# Altium PCB PCB_RocketOnBoardComputer.pcbdoc
Units mil, origin at the board's own origin, x right, y up, seen from the top; angles counter-clockwise.
Board outline 4041.49 x 3254.09 mil, 2 copper layers (Top Layer, Bottom Layer); 92 components, 79 nets, 409 pads, 65 vias.
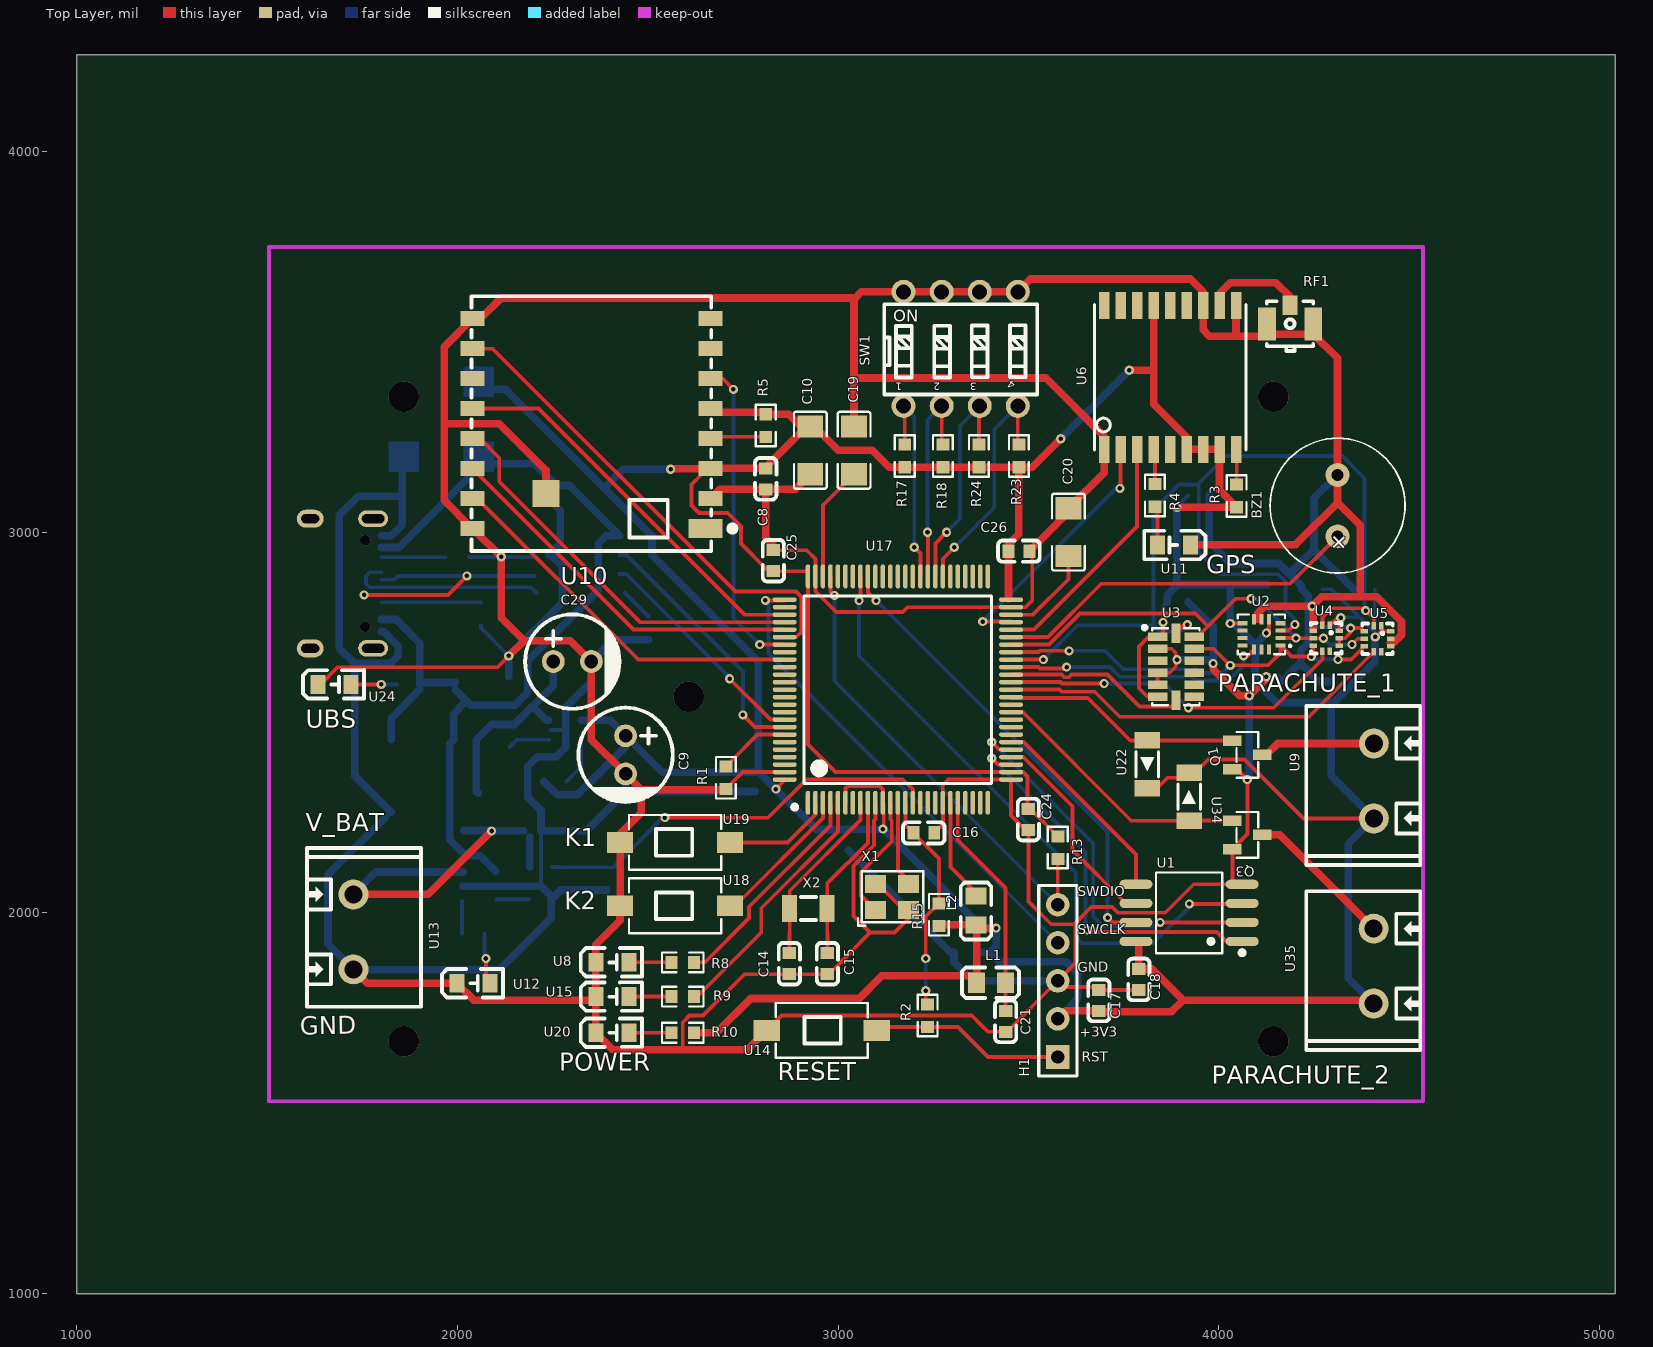
[diagram p0: Top Layer view]
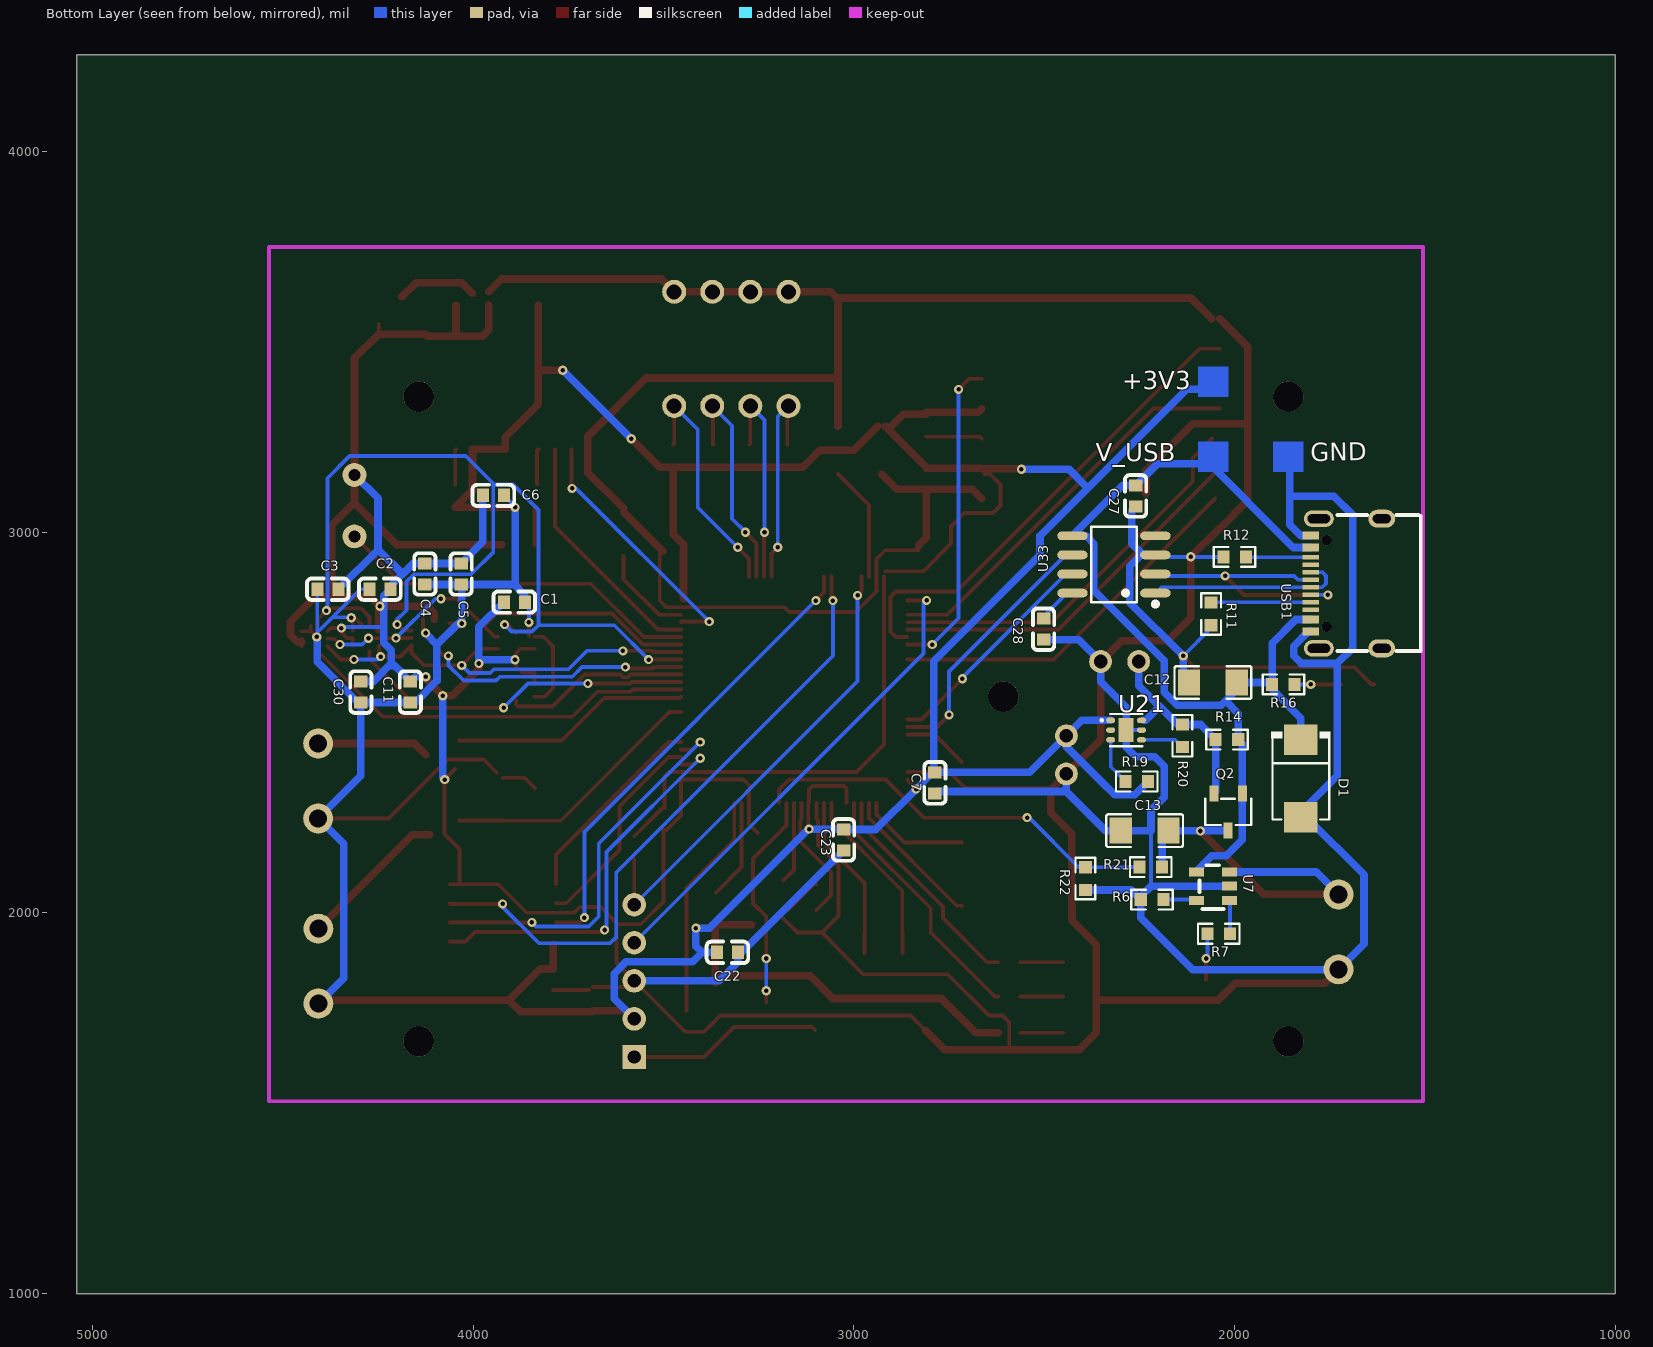
[diagram p1: Bottom Layer view, seen from below]

## Layer stack, top to bottom
Top Layer: signal copper (thickness not stored)
Dielectric: dielectric 12.6, FR-4, Dk 4.8
Bottom Layer: signal copper (thickness not stored)

## Board outline
5041.49,1000 1000,1000 1000,4254.09 5041.49,4254.09

## Components (designator, comment, footprint, x,y, rotation, side; value= is the part's Value field where it differs from the comment)
BZ1 "BUZZER_9X4MM" BUZZER_BEEPER:BUZZER_9X4MM 4311.89,2920 r90 top
C1 "100nF" C0603#1 3892.05,2816.38 r0 bottom
C2 "100nF" C0603#1 4245,2850 r180 bottom
C3 "100nF" C0603#1 4381.89,2850 r180 bottom
C4 "100nF" C0603#1 4126.89,2890 r90 bottom
C5 "100nF" C0603#1 4031.89,2890 r90 bottom
C6 "100nF" C0603#1 3947.05,3096.38 r0 bottom
C7 "100nF" C0603#1 2787.05,2341.38 r270 bottom
C8 "100nF" C0603#2 2810,3140 r90 top
C9 "100uF" CAP-D6.3×F2.5 2441.89,2415 r270 top
C10 "10uF" C1206#1 2926.89,3215 r270 top
C11 "100nF" C0603#1 4165,2580 r90 bottom
C12 "10uF" C1206#2 2056.89,2605 r180 bottom
C13 "10uF" C1206#2 2236.2,2215.92 r0 bottom
C14 "12pF" C0603#2 2872.05,1866.38 r270 top
C15 "12pF" C0603#2 2972.05,1866.38 r270 top
C16 "100nF" C0603#2 3225,2210 r180 top
C17 "100nF" C0603#2 3790,1825 r90 top
C18 "100nF" C0603#2 3685,1770 r90 top
C19 "2.2uF" C1206#1 3041.89,3215 r270 top
C20 "2.2uF" C1206#1 3605,3000 r270 top
C21 "100nF" C0603#2 3440,1715 r90 top
C22 "100nF" C0603#1 3332.05,1896.38 r180 bottom
C23 "100nF" C0603#1 3027.05,2191.38 r270 bottom
C24 "100nF" C0603#2 3500,2245 r90 top
C25 "100nF" C0603#2 2830,2925 r270 top
C26 "100nF" C0603#2 3475,2950 r180 top
C27 "100nF" C0603#1 2260,3095 r270 bottom
C28 "100nF" C0603#1 2501.89,2745 r270 bottom
C29 "100uF" CAP-D6.3×F2.5 2301.89,2660 r0 top
C30 "100nF" C0603#1 4295,2580 r90 bottom
D1 "SMBJ5.0A" SMB_L4.6-W3.5-LS5.3-RD 1825.94,2352.89 r90 bottom
H1 "HDR-F-2.54_1x5" HDR-F-2.54_1X5 3577.05,1821.38 r90 top
L1 "220Ω" L0805 3402.05,1816.38 r0 top
L2 "220Ω" L0805 3362.05,2006.38 r90 top
Q1 "AO3400B" SOT-23-3_L2.9-W1.3-P1.90-LS2.4-BR 4075,2415 r180 top
Q2 "AO3401A-3L" SOT-23-3_L2.9-W1.6-P1.90-LS2.8-BR 2016.89,2265 r270 bottom
Q3 "AO3400B" SOT-23-3_L2.9-W1.3-P1.90-LS2.4-BR 4075,2205 r180 top
R1 "10k" R0603#1 2705,2355 r90 top
R2 "10k" R0603#1 3235,1730 r90 top
R3 "10k" R0603#1 4046.89,3095 r90 top
R4 "1k" R0603#1 3832.05,3096.38 r270 top
R5 "10k" R0603#1 2810,3280 r270 top
R6 "10k" R0603#2 2216.89,2035 r180 bottom
R7 "470" R0603#2 2041.89,1945 r180 bottom
R8 "470" R0603#1 2591.89,1870 r180 top
R9 "470" R0603#1 2591.89,1780 r180 top
R10 "470" R0603#1 2591.89,1685 r180 top
R11 "5.1k" R0603#2 2061.89,2785 r90 bottom
R12 "5.1k" R0603#2 2000,2935 r0 bottom
R13 "1k" R0603#1 3577.05,2171.38 r90 top
R14 "100k" R0603#2 2020,2455 r0 bottom
R15 "10k" R0603#1 3265,1995 r90 top
R16 "470" R0603#2 1871.89,2600 r0 bottom
R17 "1k" R0603#1 3175,3200 r270 top
R18 "1k" R0603#1 3275,3200 r270 top
R19 "10k" R0603#2 2256.89,2345 r0 bottom
R20 "10k" R0603#2 2136.89,2465 r90 bottom
R21 "100k" R0603#2 2220,2120 r180 bottom
R22 "100k" R0603#2 2391.89,2090 r90 bottom
R23 "1k" R0603#1 3475,3200 r270 top
R24 "1k" R0603#1 3370,3200 r270 top
RF1 "U.FL-R-SMT-1(01)" RF-SMD_U.FL-R-SMT-1-80 4187.05,3571.38 r180 top
SW1 "DIP switchEI-04" SW-TH_DIPSWITCHEI-04 3322.05,3481.38 r0 top
U1 "W25Q128DR-TD" SOP-8_L5.3-W5.3-P1.27-LS7.9-BL 3921.89,2000 r90 top
U2 "LSM6DS3TR-C" LGA-14_L3.0-W2.5-P0.50-TL 4112.05,2731.38 r180 top
U3 "ADXL375BCCZ" LGA-14_L5.0-W3.0-P0.80-BL-1 3887.05,2646.38 r270 top
U4 "BMP388" SENSORM-SMD_BMP388 4282.05,2721.38 r0 top
U5 "BMP388" SENSORM-SMD_BMP388 4416.89,2720 r0 top
U6 "MAX-M10S-00B" SMD-18_L10.1-W9.7-P1.10-TL_SKG09F 3872.05,3406.38 r90 top
U7 "MCP73831T-2DCI/OT" SOT-23-5_L2.9-W1.6-P0.95-LS2.8-BL 2056.89,2070 r270 bottom
U8 "GREEN-SML0805" LED0805-RD_GREEN 2406.89,1870 r0 top
U9 "DG301-5.0-02P-14-00A(H)" CONN-TH_DEGSON_DG301-5.0-02P 4407.05,2346.38 r90 top
U10 "RA-01SH-P" COMM-SMD_17P-L17.0-W16.0-P2.00_RA-01S-P 2351.89,3285 r180 top
U11 "GREEN-SML0805" LED0805-RD_GREEN 3882.05,2966.38 r180 top
U12 "GREEN-SML0805" LED0805-RD_GREEN 2041.89,1815 r0 top
U13 "DG301-5.0-02P-14-00A(H)" CONN-TH_DEGSON_DG301-5.0-02P 1726.89,1950 r270 top
U14 "BUTTON2" SW-SMD_L6.0-W3.5-LS8.0-1 2957.05,1691.38 r0 top
U15 "GREEN-SML0805" LED0805-RD_GREEN 2406.89,1780 r0 top
U17 "STM32H743VIT6TR" LQFP-100_L14.0-W14.0-P0.50-LS16.0-BL 3157.05,2586.38 r0 top
U18 "BUTTON2" SW-SMD_L6.0-W3.5-LS8.0-1 2571.73,2018.62 r180 top
U19 "BUTTON2" SW-SMD_L6.0-W3.5-LS8.0-1 2571.89,2185 r180 top
U20 "GREEN-SML0805" LED0805-RD_GREEN 2406.89,1685 r0 top
U21 "LP5912-3.3DRVT" WSON-6_L2.0-W2.0-P0.65-TL-EP 2285,2480 r0 bottom
U22 "1N4148/S" LL-34_L3.5-W1.5-RD 3811.89,2390 r90 top
U24 "GREEN-SML0805" LED0805-RD_GREEN 1676.89,2600 r0 top
U33 "CH340N" SOP-8_L5.0-W4.0-P1.27-LS6.0-BL 2316.89,2915 r270 bottom
U34 "1N4148/S" LL-34_L3.5-W1.5-RD 3921.89,2305 r270 top
U35 "DG301-5.0-02P-14-00A(H)" CONN-TH_DEGSON_DG301-5.0-02P 4406.89,1860 r90 top
USB1 "JACK-USB-C-16P" USB-C-SMD_TYPE-C-6PIN-2MD-073 1706.89,2865 r270 bottom
X1 "25MHz" OSC-SMD_4P-L3.2-W2.5-BL 3142.05,2041.38 r0 top
X2 "32.768kHz" FC-135R_L3.2-W1.5 2922.05,2011.38 r180 top

## Footprints (in the part's own frame and the unit in brackets; to place one, negate y for a bottom-side part, rotate by r counter-clockwise, add the part's x,y. Pads: shape width x height; smd on the part's side, far side on the other; paste and mask are expansions set on the pad)
BUZZER_BEEPER:BUZZER_9X4MM [mm]
  round 1.6 hole 0.8 paste+0 mask+0.1: 1(1.75,0) 2(5.85,0)
  silkscreen extent -0.7,-4.5 8.3,4.5
C0603#1 [mm]
  rect 0.8x0.9 smd paste+0 mask+0.051: 1(0.7,0) 2(-0.7,0)
  silkscreen extent -1.39,-0.71 1.39,0.71
C0603#2 [mm]
  rect 0.8x0.9 smd paste+0 mask+0.051: 1(-0.7,0) 2(0.7,0)
  silkscreen extent -1.39,-0.71 1.39,0.71
C1206#1 [mm]
  rect 1.485x1.728 smd paste-100 mask+0.051: 1(-1.593,0) 2(1.593,0)
  silkscreen extent -2.56,-1.09 2.56,1.09
C1206#2 [mm]
  rect 1.485x1.728 smd paste-100 mask+0.051: 1(1.593,0) 2(-1.593,0)
  silkscreen extent -2.56,-1.09 2.56,1.09
CAP-D6.3×F2.5 [mil]
  round 60 hole 36 paste+0 mask+4: 1(-50,0) 2(50,0)
  silkscreen extent -124,-124 125,124
COMM-SMD_17P-L17.0-W16.0-P2.00_RA-01S-P [mm]
  rect 2.26x1.27 smd paste+0 mask+0.05: 1(-7.61,7)
  rect 1.6x1 smd paste+0 mask+0.05: 2(-7.94,5) 3(-7.94,3) 4(-7.94,1) 5(-7.94,-1) 6(-7.94,-3) 7(-7.94,-5) 8(-7.94,-7) 9(7.94,-7) 10(7.94,-5) 11(7.94,-3) 12(7.94,-1) 13(7.94,1) 14(7.94,3) 15(7.94,5) 16(7.94,7)
  rect 1.8x1.8 smd paste+0 mask+0.05: 17(3.03,4.66)
  silkscreen extent -9.61,-8.5 8,8.5
CONN-TH_DEGSON_DG301-5.0-02P [mm]
  round 2 hole 1.2 paste+0 mask+0.05: 1(-2.5,0) 2(2.5,0)
  silkscreen extent -5.6,-3.1 5,4.5
FC-135R_L3.2-W1.5 [mm]
  rect 1x1.8 smd paste+0 mask+0.051: 1(-1.25,0) 2(1.25,0)
  silkscreen extent -0.51,-0.76 0.51,0.76
HDR-F-2.54_1X5 [mil]
  rect 62x62 hole 35 paste+0 mask+2: 1(-200,0)
  round 62 hole 35 paste+0 mask+2: 2(-100,0) 3(0,0) 4(100,0) 5(200,0)
  silkscreen extent -250,-50 250,50
L0805 [mil]
  rect 44.59x54.21 smd paste-3937.01 mask+2: 1(-38.05,0) 2(38.04,0)
  silkscreen extent -77,-40 73,40
LED0805-RD_GREEN [mm]
  rect 1x1.25 smd paste+0 mask+0.051: 1(-1.1,0) 2(1.1,0)
  silkscreen extent -2.1,-0.95 1.98,0.96
LGA-14_L3.0-W2.5-P0.50-TL [mm]
  rect 0.675x0.28 smd paste+0 mask+0.051: 1(-1.262,0.75) 2(-1.262,0.25) 3(-1.262,-0.25) 4(-1.262,-0.75) 8(1.262,-0.75) 9(1.262,-0.25) 10(1.262,0.25) 11(1.262,0.75)
  rect 0.28x0.675 smd paste+0 mask+0.051: 5(-0.5,-1.012) 6(0,-1.012) 7(0.5,-1.012) 12(0.5,1.012) 13(0,1.012) 14(-0.5,1.012)
  silkscreen extent -1.98,-1.33 1.58,1.33
LGA-14_L5.0-W3.0-P0.80-BL-1 [mm]
  rect 0.55x1.3 smd paste+0 mask+0.051: 1(-2,-1.22) 2(-1.2,-1.22) 3(-0.4,-1.22) 4(0.4,-1.22) 5(1.2,-1.22) 6(2,-1.22) 8(2,1.22) 9(1.2,1.22) 10(0.4,1.22) 11(-0.4,1.22) 12(-1.2,1.22) 13(-2,1.22)
  rect 1.3x0.6 smd paste+0 mask+0.051: 7(2.23,0) 14(-2.23,0)
  silkscreen extent -2.74,-2.2 2.58,1.58
LL-34_L3.5-W1.5-RD [mm]
  rect 1.1x1.7 smd paste+0 mask+0.051: 1(-1.6,0) 2(1.6,0)
  silkscreen extent -0.85,-0.75 0.85,0.75
LQFP-100_L14.0-W14.0-P0.50-LS16.0-BL [mm]
  oval 0.3x1.6 smd paste+0 mask+0.051: 1(-6,-7.55) 2(-5.5,-7.55) 3(-5,-7.55) 4(-4.5,-7.55) 5(-4,-7.55) 6(-3.5,-7.55) 7(-3,-7.55) 8(-2.5,-7.55) 9(-2,-7.55) 10(-1.5,-7.55) 11(-1,-7.55) 12(-0.5,-7.55) 13(0,-7.55) 14(0.5,-7.55) 15(1,-7.55) 16(1.5,-7.55) 17(2,-7.55) 18(2.5,-7.55) 19(3,-7.55) 20(3.5,-7.55) 21(4,-7.55) 22(4.5,-7.55) 23(5,-7.55) 24(5.5,-7.55) 25(6,-7.55) 51(6,7.55) 52(5.5,7.55) 53(5,7.55) 54(4.5,7.55) 55(4,7.55) 56(3.5,7.55) 57(3,7.55) 58(2.5,7.55) 59(2,7.55) 60(1.5,7.55) 61(1,7.55) 62(0.5,7.55) 63(0,7.55) 64(-0.5,7.55) 65(-1,7.55) 66(-1.5,7.55) 67(-2,7.55) 68(-2.5,7.55) 69(-3,7.55) 70(-3.5,7.55) 71(-4,7.55) 72(-4.5,7.55) 73(-5,7.55) 74(-5.5,7.55) 75(-6,7.55)
  oval 1.6x0.3 smd paste+0 mask+0.051: 26(7.55,-6) 27(7.55,-5.5) 28(7.55,-5) 29(7.55,-4.5) 30(7.55,-4) 31(7.55,-3.5) 32(7.55,-3) 33(7.55,-2.5) 34(7.55,-2) 35(7.55,-1.5) 36(7.55,-1) 37(7.55,-0.5) 38(7.55,0) 39(7.55,0.5) 40(7.55,1) 41(7.55,1.5) 42(7.55,2) 43(7.55,2.5) 44(7.55,3) 45(7.55,3.5) 46(7.55,4) 47(7.55,4.5) 48(7.55,5) 49(7.55,5.5) 50(7.55,6) 76(-7.55,6) 77(-7.55,5.5) 78(-7.55,5) 79(-7.55,4.5) 80(-7.55,4) 81(-7.55,3.5) 82(-7.55,3) 83(-7.55,2.5) 84(-7.55,2) 85(-7.55,1.5) 86(-7.55,1) 87(-7.55,0.5) 88(-7.55,0) 89(-7.55,-0.5) 90(-7.55,-1) 91(-7.55,-1.5) 92(-7.55,-2) 93(-7.55,-2.5) 94(-7.55,-3) 95(-7.55,-3.5) 96(-7.55,-4) 97(-7.55,-4.5) 98(-7.55,-5) 99(-7.55,-5.5) 100(-7.55,-6)
  silkscreen extent -7.03,-8 6.25,6.25
OSC-SMD_4P-L3.2-W2.5-BL [mm]
  rect 1.4x1.2 smd paste+0 mask+0.051: 1(-1.1,-0.875) 2(1.1,-0.875) 3(1.1,0.875) 4(-1.1,0.875)
  silkscreen extent -2.29,-1.9 2.07,1.72
R0603#1 [mil]
  rect 31.75x34.02 smd paste-3937.01 mask+2: 1(-29.66,0) 2(29.66,0)
  silkscreen extent -55,-26 55,26
R0603#2 [mil]
  rect 31.75x34.02 smd paste-3937.01 mask+2: 1(29.65,0) 2(-29.66,0)
  silkscreen extent -55,-26 55,26
RF-SMD_U.FL-R-SMT-1-80 [mm]
  rect 1.2x2.2 smd paste+0 mask+0.051: 1(-1.55,0.612) 3(1.55,0.612)
  rect 1x1.3 smd paste+0 mask+0.051: 2(0,-0.612)
  silkscreen extent -1.55,-0.89 1.55,2.43
SENSORM-SMD_BMP388 [mm]
  rect 0.3x0.5 smd paste+0 mask+0.05: 1(0.25,0.871) 2(-0.25,0.871) 6(-0.25,-0.871) 7(0.25,-0.871)
  rect 0.5x0.3 smd paste+0 mask+0.05: 3(-0.869,0.5) 4(-0.869,0) 5(-0.869,-0.5) 8(0.869,-0.5) 9(0.869,0) 10(0.869,0.5)
  silkscreen extent -1.02,-1.02 1.02,1.02
SMB_L4.6-W3.5-LS5.3-RD [mil]
  rect 80.61x88.23 smd paste+0 mask+2: 1(102.02,0) 2(-102.02,0)
  silkscreen extent -108,-77 123,77
SMD-18_L10.1-W9.7-P1.10-TL_SKG09F [mm]
  rect 1.8x0.7 smd paste+0 mask+0.05: 1(-4.8,4.4) 2(-4.8,3.3) 3(-4.8,2.2) 4(-4.8,1.1) 5(-4.8,0) 6(-4.8,-1.1) 7(-4.8,-2.2) 8(-4.8,-3.3) 9(-4.8,-4.4) 10(4.8,-4.4) 11(4.8,-3.3) 12(4.8,-2.2) 13(4.8,-1.1) 14(4.8,0) 15(4.8,1.1) 16(4.8,2.2) 17(4.8,3.3) 18(4.8,4.4)
  silkscreen extent -4.85,-5.05 4.85,5.05
SOP-8_L5.0-W4.0-P1.27-LS6.0-BL [mil]
  oval 22.6x80.14 smd paste+0 mask+2: 1(75,108.97) 2(25,108.97) 3(-25,108.97) 4(-75,108.97) 5(-75,-108.97) 6(-25,-108.97) 7(25,-108.97) 8(75,-108.97)
  silkscreen extent -99,-60 110,115
SOP-8_L5.3-W5.3-P1.27-LS7.9-BL [mil]
  oval 23.98x86.79 smd paste+0 mask+2: 1(-75,-139.46) 2(-25,-139.46) 3(25,-139.46) 4(75,-139.46) 5(75,139.46) 6(25,139.46) 7(-25,139.46) 8(-75,139.46)
  silkscreen extent -111,-145 106,87
SOT-23-3_L2.9-W1.3-P1.90-LS2.4-BR [mm]
  rect 1.25x0.7 smd paste+0 mask+0.051: 1(1,-0.95) 2(1,0.95) 3(-1,0)
  silkscreen extent -0.73,-1.53 0.73,1.53
SOT-23-3_L2.9-W1.6-P1.90-LS2.8-BR [mm]
  rect 1.07x0.6 smd paste+0 mask+0.051: 1(-1.235,0.95) 2(-1.235,-0.95) 3(1.235,0)
  silkscreen extent -0.88,-1.54 0.88,1.54
SOT-23-5_L2.9-W1.6-P0.95-LS2.8-BL [mm]
  rect 0.6x1 smd paste+0 mask+0.05: 1(0.95,1.1) 2(0,1.1) 3(-0.95,1.1) 4(-0.95,-1.1) 5(0.95,-1.1)
  silkscreen extent -1.4,-0.89 1.52,0.7
SW-SMD_L6.0-W3.5-LS8.0-1 [mm]
  rect 1.74x1.4 smd paste+0 mask+0.051: 1(-3.67,0) 2(3.67,0)
  silkscreen extent -3.08,-1.83 3.08,1.83
SW-TH_DIPSWITCHEI-04 [mm]
  round 1.6 hole 1 paste+0 mask+0.051: 1(-3.81,-3.81) 2(-1.27,-3.81) 3(1.27,-3.81) 4(3.81,-3.81) 5(3.81,3.81) 6(1.27,3.81) 7(-1.27,3.81) 8(-3.81,3.81)
  silkscreen extent -5.1,-3.05 5.11,2.98
USB-C-SMD_TYPE-C-6PIN-2MD-073 [mm]
  rect 0.55x1.1 smd paste-100 mask+0.05: 1(3.2,-2.375) 2(2.4,-2.375) 11(-2.4,-2.375) 12(-3.2,-2.375)
  rect 0.3x1.1 smd paste-100 mask+0.05: 3(1.75,-2.375) 4(1.25,-2.375) 5(0.75,-2.375) 6(0.25,-2.375) 7(-0.25,-2.375) 8(-0.75,-2.375) 9(-1.25,-2.375) 10(-1.75,-2.375)
  oval 1.1x2 hole 0.6 slot 1.5 at 90 deg paste+0 mask+0.05: 13(4.325,-1.825) 14(-4.325,-1.825)
  oval 1.2x1.8 hole 0.6 slot 1.2 at 90 deg paste+0 mask+0.05: 13(4.325,2.375) 14(-4.325,2.375)
  round 0.7 hole 0.7 unplated paste+0: ""(-2.89,-1.305) ""(2.89,-1.305)
  silkscreen extent -4.57,-0.6 4.5,4.97
WSON-6_L2.0-W2.0-P0.65-TL-EP [mm]
  oval 0.607x0.364 smd paste+0 mask+0.051: 1(1.028,-0.65) 2(1.028,0) 3(1.028,0.65) 4(-1.028,0.65) 5(-1.028,0) 6(-1.028,-0.65)
  rect 1x1.6 smd paste+0 mask+0.051: 7(0,0)
  silkscreen extent -1.08,-1.08 1.71,1.08

## Free pads (board coordinates)
  round 80 hole 80 unplated paste+0: ""(1859.33,1662.48) ""(1859.33,3355.39) ""(2607.36,2567.99) ""(4142.79,1662.48) ""(4142.79,3355.39)

## Via types
v1: diameter 24.02, hole 12.01, Top Layer to Bottom Layer, tented both sides, 46 vias
v2: diameter 24.41, hole 12.2, Top Layer to Bottom Layer, tented both sides, 19 vias

## Nets (pads, with @x,y where several pads share a name; then routed paths per layer and width w, separated by ;. In a path a pad name is that pad's centre, name@x,y a point inside that pad or via, vN(x,y) a via of type N, cw(c..) or ccw(c..) an arc to the next point about the centre after c; other vN are vias at no path point)
+3V3: C1.2 C2.2 C3.2 C4.2 C5.2 C6.2 C7.2 C8.2 C9.1 C10.1 C11.2 C17.2 C18.1 C22.2 C23.2 C24.2 C25.2 C26.2 C30.2 H1.2 L1.1 L2.1 R3.1 R5.1 R10.1 R13.2 R15.1 R17.2 R18.2 R19.2 R23.2 R24.2 U1.8 U2.5 U2.8 U3.1 U3.6 U4.1 U4.10 U5.1 U5.10 U6.6 U6.7 U6.8 U6.15 U9.1 U10.3 U10.5 U17.6 U17.11 U17.27 U17.50 U17.75 U17.100 U21.1 U22.1 U34.1 U35.1 | length 14463.5
  Top Layer w10: U10.3@2656.89,3151.9 2641.89,3151.9 2614.99,3125 2614.99,3070 2634.99,3050 2709.99,3050 2744.99,3015 2744.99,2970 2817.59,2897.4 C25.2 U17.75@2917.59,2897.4 ; v1(2836.69,2325.17) 2859.81,2348.29 U17.100 ; U17.75 2920.83,2442.16 2993.15,2369.84 U17.27 3486.12,2369.84 3497.76,2358.2 C24.2@3497.76,2274.8 ; U17.6@3019.25,2289.14 3019.25,2326.37 3025.91,2333.03 3108.72,2333.03 3117.68,2324.07 U17.11 3120,2286.82 v1@3120,2220 ; C24.2@3505.53,2272.56 R13.2 ; U22.1@3836.99,2327 3864.99,2355 U34.1@3921.89,2355 ; U3.6 3812.39,2567.6 3789.99,2590 3789.99,2700 3815.09,2725.1 U3.1 ; U3.1@3853.49,2728.5 v1(3853.51,2763) ; U34.1@3937.99,2368 3972.39,2402.4 4067.59,2402.4 4222.09,2248 U9.1 ; v1(4030,2760) U2.8 ; v1(4125,2735) 4131.74,2741.74 U2.5 ; U4.1 4311.19,2775 v2(4320,2775) 4316.27,2771.27 U4.10 ; v1(4411.03,2724.94) 4426.73,2740.64 U5.1 ; 4426.69,2740.6 U5.10
  Top Layer w20: v2(2560,3165) 2561.89,3166.89 U10.3 2665.15,3167.56 C8.2 2810,3170.67 C10.1@2917.03,3277.7 ; R10.1@2621.59,1685 2679.99,1685 2769.99,1775 3054.99,1775 3114.99,1835 L1.1@3363.99,1835 ; U10.5 2673.89,3315 2810,3315 R5.1 2870.33,3309.66 C10.1@2902.29,3277.7 ; C10.1@2937.29,3277.7 2999.99,3215 3089.99,3215 3134.69,3170.3 R17.2 ; R17.2 R18.2 R24.2 R23.2 ; R15.1@3267.99,1968.34 L2.1 ; L2.1@3363.71,1960 v1(3415,1960) ; L1.1 L2.1@3364.01,1966.38 ; C26.2 3447.39,2967.4 3474.99,2995 R23.2 3510.29,3170.3 v2(3585,3245) ; U17.50@3447.49,2824.9 C26.2@3447.49,2950 ; H1.2 3598.11,1742.44 C18.1 ; C18.1 3687.39,1740 3875.69,1740 3906.29,1770.6 3824.33,1852.56 C17.2 U1.8@3790,1917.42 ; v2(3765,3425) 3828.79,3424.5 ; U6.15@3828.79,3595.4 3828.79,3336.2 3915.39,3249.6 U6.6 ; v1@3889.99,3065.3 R3.1 ; 3906.26,1770.61 4397.86,1770.61 U35.1 ; U6.6 U6.8 4001.97,3110.26 R3.1
  Bottom Layer w10: v1(3853.51,2763) 3853.51,2805.4 C1.2 C1.2@3866.11,2816.38 ; v1(3890,3065) 3890,3066.89 C6.2 ; C2.2 4296.19,2850 4411.03,2735.16 v1(4411.03,2724.94) 4409.45,2724.94 4409.45,2726.4 C3.2 ; v2(4320,2775) 4321.52,2776.52 4369.67,2776.52
  Bottom Layer w20: 2079.99,3375 2126.29,3375 2511.09,2990.2 2511.09,2940.2 2790.49,2660.7 2790.49,2368.9 C7.2 ; R19.2 2262.23,2310 2315,2310 2350,2345 2441.89,2436.89 C9.1 ; U21.1 2401.3,2505.59 C9.1 ; 2385.69,3115.6 2434.99,3165 v2(2560,3165) ; C7.2@2787.05,2368.94 2537.95,2368.94 C9.1 ; C7.2@2794.99,2368.9 2794.99,2366.9 v1(2836.69,2325.17) ; v1(2836.69,2325.17) 2942.91,2218.94 C23.2 3028.11,2220 3120,2220 3380,1960 v1(3415,1960) 3415,1912.81 3398.59,1896.4 ; C22.2@3368.59,1896.4 3398.59,1896.4 ; H1.2 3629.99,1774.3 3629.99,1840 3598.59,1871.4 3423.59,1871.4 3398.59,1896.4 ; v2(3585,3245) v2(3765,3425) ; C1.2 3864.49,2834.18 3892.75,2862.44 ; v1(3890,3065) 3890,2865.19 3892.75,2862.44 ; C5.2 C4.2 ; 4095.19,2644.1 4095.19,2609.8 C11.2@4152.59,2552.4 ; 4095.23,2644.1 4095.23,2704.31 ; v1(4125,2735) 4125,2734.08 4095.23,2704.31 ; C11.2 C30.2 4295,2360.01 U9.1@4407.05,2247.96 ; C30.2@4302.49,2552.4 4409.99,2660 4409.99,2723.9 v1(4411.03,2724.94) ; U35.1 4339.99,1828.5 4339.99,2180.9 U9.1 ; 3892.75,2862.44 C5.2 4030,2860.55 v1(4030,2760) 4039.54,2760 4095.23,2704.31
  other v1: 3117.67,2220
BUSY_LORA: U10.10 U17.81 | length 1275.6
  Top Layer w10: U10.10 2092.04,3481.85 2730.13,2843.76 2889.49,2843.76 2903.53,2829.72 2903.53,2737.79 2889.92,2724.18 U17.81
BUZZER: BZ1.1 U17.45 | length 967.3
  Top Layer w10: U17.45 3551.04,2724.18 3691.13,2864.27 4187.26,2864.27 BZ1.1
C28_2: C28.2 U33.8 | length 87.5
  Bottom Layer w10: U33.8@2439.99,2840 C28.2@2501.89,2778.1
CLK_FLASH: U1.6 U17.29 | length 554.8
  Top Layer w10: U17.29 3486.51,2409.21 3615.54,2280.18 3615.54,2164.94 3755.48,2025 U1.6
CS_ADXL: U3.7 U17.40 | length 487.4
  Top Layer w10: U17.40@3454.29,2626 3587.39,2626 3593.79,2619 3606.79,2619 3613.29,2626 3707.89,2626 3791.79,2542 3881.99,2542 3887.09,2547.1 U3.7@3887.09,2558.6
CS_BMP1: U4.6 U17.39 | length 919.6
  Top Layer w10: U17.39 3584.33,2606.07 3588.01,2602.39 v1(3698.64,2602.39) ; v1(3920.11,2538.53) 4144.49,2538.53 4272.21,2666.25 U4.6
  Bottom Layer w10: v1(3698.64,2602.39) 3856.25,2602.39 v1(3920.11,2538.53)
CS_BMP2: U5.6 U17.38 | length 1052.9
  Top Layer w10: U17.38 3581.29,2586.4 3586.99,2580.7 3674.29,2580.7 3739.79,2515.2 4236.59,2515.2 U5.6@4407.09,2685.7
CS_FLASH: U1.1 U17.28 | length 1037.9
  Top Layer w10: v1(3403.43,2406.23) 3420.13,2389.53 U17.28 ; v1(3655,1955) 3654.99,1950 3994.99,1950 4019.99,1925 U1.1@4061.39,1925
  Bottom Layer w10: v1(3403.43,2406.23) 3649.99,2159.7 3649.99,1955 v1(3655,1955)
CS_LORA: U10.15 U17.84 | length 983.2
  Top Layer w10: U10.15@2051.84,3088.15 2474.89,2665.1 U17.84
CS_LSM: U2.12 U17.41 | length 703.9
  Top Layer w10: U17.41 3526.37,2645.44 3529.74,2642.07 3596.9,2642.07 v1(3600.27,2645.44) ; v1(4065,2675) 4075.85,2675 U2.12
  Bottom Layer w10: v1(3600.27,2645.44) 3714.59,2645.4 3739.99,2620 3929.99,2620 3939.99,2610 4024.99,2610 4064.99,2650 v1(4065,2675)
DI_FLASH: U1.5 U17.31 | length 528.9
  Top Layer w10: U17.31 3487.41,2448.58 3782.43,2153.56 U1.5
DIO1_LORA: U10.6 U17.82 | length 837
  Top Layer w10: U10.6 2696.89,3403.11 v1(2725,3375) ; v1(2794.14,2704.49) U17.82
  Bottom Layer w10: v1(2725,3375) 2725,2773.63 v1(2794.14,2704.49)
DO_FLASH: U1.2 U17.30 | length 1033.5
  Top Layer w10: v1(3403.71,2448.64) 3423.45,2428.9 U17.30 ; v1(3845.94,1975) U1.2@4061.35,1975
  Bottom Layer w10: v1(3403.71,2448.64) 3669.99,2182.4 3669.99,1990.7 3696.29,1964.5 3835.39,1964.5 v1@3845.99,1975
GND: BZ1.2 C1.1 C2.1 C3.1 C4.1 C5.1 C6.1 C7.1 C8.1 C9.2 C10.2 C11.1 C12.2 C13.1 C14.2 C15.2 C16.1 C17.1 C18.2 C19.1 C20.1 C21.1 C22.1 C23.1 C24.1 C25.1 C26.1 C27.1 C28.1 C29.2 C30.1 D1.2 H1.3 Q1.2 Q3.2 R1.1 R6.2 R11.2 R12.1 R22.2 RF1.1 RF1.3 SW1.5 SW1.6 SW1.7 SW1.8 U1.4 U2.6 U2.7 U3.2 U3.4 U3.5 U4.3 U4.8 U4.9 U5.3 U5.8 U5.9 U6.1 U6.10 U6.12 U7.2 U8.1 U10.2 U10.9 U10.16 U10.17 U11.1 U12.1 U13.2 U14.1 U15.1 U17.10 U17.19 U17.26 U17.49 U17.74 U17.99 U18.2 U19.2 U20.1 U21.5 U21.7 U24.1 U33.3 USB1.1 USB1.12 X1.2 X1.4 | length 24324.1
  Top Layer w10: U24.1 1639.99,2600 1684.99,2645 2104.99,2645 v1(2135,2675) ; 2591.89,1645 2591.89,1711.9 2609.99,1730 2644.99,1730 2753.79,1838.8 C14.2 ; R1.1 2749.5,2369.84 U17.99 ; U14.1 2851.18,1730 3350.87,1730 3379.49,1701.38 3393.43,1687.44 C21.1 ; C25.1 2917.44,2952.56 2940.51,2929.49 U17.74 2940.49,2844.7 2995.19,2790 3169.99,2790 3182.89,2802.9 U17.49 3492.89,2802.9 3509.99,2820 C26.1@3509.99,2942.6 ; C14.2@2872.05,1838.82 C15.2@2972.05,1838.82 ; C15.2@2976.29,1838.8 3084.09,1948 ; 3084.05,1948.3 3040.4,1991.95 3040.4,2123.21 3094.62,2177.43 3094.62,2243.39 3097.99,2246.76 U17.10 ; 3084.09,1948.3 3148.29,1948.3 X1.2@3185.39,1985.4 ; X1.4@3098.79,2075.8 3104.19,2075.8 X1.2@3173.09,2006.9 ; C16.1 3275.19,2232.63 U17.19 3274.99,2335 3290.19,2350.2 U17.26 3454.29,2255.7 C24.1@3492.59,2217.4 ; C21.1@3443.09,1687.4 H1.3 ; C24.1 3499.99,2030 3559.99,1970 3623.59,1970 ; H1.3@3577.05,1821.38 3623.59,1867.92 3623.59,1973.5 3664.99,2015 3719.99,2015 3734.89,2000.1 3859.39,2000.1 3934.29,2075 U1.4@4061.39,2075 ; H1.3@3593.39,1805 C18.2@3684.99,1805 ; C18.2@3695.12,1797.44 C17.1 ; U3.5 U3.4 3871.3,2630.63 3887.05,2646.38 ; U3.2 3876.39,2693.6 3887.09,2682.9 3887.09,2646.4 ; Q3.2 4075,2207.01 v2(4075,2350) ; U1.4@4035.63,2084.45 Q3.2 ; Q1.2@4047.4,2377.6 v2(4075,2350) ; v2@4075,2339.44 v2(4075,2350) ; RF1.1@4248.08,3520.13 RF1.1 ; U4.8 U4.9 ; U4.9 4331.39,2721.4 4346.09,2736.1 v1(4346.06,2748.08) ; v1(4346.06,2748.08) 4374.27,2748.08 U5.3 ; U5.8 U5.9
  Top Layer w20: U13.2 1763.46,1815 U12.1 2043.59,1770 2353.59,1770 U15.1 ; 1965,3285.19 2109.81,3285.19 2232.6,3162.4 U10.17 ; U10.16 1965,3083.7 1965,3486.3 U10.9 ; U10.16@2040.59,3009.41 v2(2115,2935) 2115,2775 2175,2715 ; U10.9@2060.59,3560.6 2114.99,3615 3041.89,3615 3041.89,3596 3041.89,3376.86 C19.1 ; v1(2135,2675) 2175,2715 ; U18.2 2427.24,1980.07 2363.58,1916.41 U8.1 U15.1 ; U18.2@2427.39,2018.6 U19.2 2427.39,2207.4 2483.09,2263.1 2483.09,2324 ; U10.2@2664.49,3088.15 2688.78,3112.44 C8.1 2887.03,3112.44 C10.2 ; R1.1@2703.44,2323.78 2483.11,2323.78 C9.2 2351.89,2455 C29.2 2296.89,2715 2175,2715 ; C8.1 2809.99,2985 C25.1@2829.99,2965 ; U14.1 2761.19,1640 2408.59,1640 U20.1 U15.1 ; 3041.89,3405 3544.99,3405 3698.79,3251.2 U6.1 3698.79,3156.49 C20.1 ; 3041.89,3611.9 3061.39,3631.4 SW1.8 ; SW1.8@3172.05,3631.38 3272.05,3631.38 3372.05,3631.38 SW1.5@3472.05,3631.38 ; SW1.5 3505.69,3665 3925,3665 3958.67,3631.33 ; C26.1 C20.1@3605,3052.44 ; U11.1 4201.39,2966.4 4311.89,3076.9 ; U6.12 3958.67,3531.33 3975,3515 RF1.3@4120,3515 ; v2(3985,2655) 3984.99,2640 4054.99,2570 v2(4080,2570) 4125,2615 v2(4125,2620) ; 4045.28,3515 U6.10 ; 4101.85,2771.25 4101.85,2786.85 4120,2805 v2(4245,2805) ; RF1.3@4126.03,3520.13 4248.08,3520.13 4311.89,3456.32 BZ1.2 4311.89,3076.9 ; v2@4235,2805 v2(4245,2805) ; U4.3@4247.83,2743.37 4247.83,2802.17 v2(4245,2805) ; 4371.13,2830 4371.13,3017.66 4311.89,3076.9 ; 4451.11,2710.35 4460.35,2710.35 4480,2730 4480,2765 4415,2830 4270,2830 v2(4245,2805)
  Bottom Layer w10: R12.1 U33.3@2202.92,2935 ; R11.2 2061.89,2748.11 v1(2135,2675) ; v2@2114.87,2935 v2(2115,2935) ; 2219.61,2070 2219.61,2215.92 ; U21.5 U21.7 ; 4232.69,2750.5 v1@4347.29,2750.5
  Bottom Layer w20: U13.2 1728.49,1850 2109.99,1850 2246.59,1986.6 2246.59,2035 2271.59,2060 R22.2@2391.89,2060 ; U13.2@1726.89,1852 1659.99,1918.9 1659.99,2099.5 D1.2@1811.39,2250.9 ; USB1.1 1805.99,2739 1844.99,2700 1844.99,2675 1824.99,2655 1729.99,2655 ; USB1.12 1825.98,2990.98 1855,3020 1855,3160 ; D1.2@1825.99,2264.1 1729.99,2360 1729.99,2655 ; 1854.99,3094.6 1739.59,3094.6 1689.99,3045 1689.99,2695 1729.99,2655 ; U7.2 2219.61,2070 R6.2@2246.59,2043.1 ; C12.2@2135,2620.41 v1(2135,2675) 2274.99,2815 2274.99,2910 U33.3@2244.99,2940 ; U33.3@2240,2940 2270,2970 2270,3057.44 C27.1 ; C9.2 2441.89,2318.69 ; C28.1 2409.33,2717.44 C29.2 2351.89,2606.9 2284.99,2540 U21.7 2284.99,2435 2259.99,2410 2209.89,2410 2184.99,2385.1 2184.99,2303.9 2219.59,2269.3 2219.59,2215.9 C13.1 2339.12,2215.92 2441.89,2318.69 ; C7.1@2782.18,2318.69 2441.89,2318.69 ; C23.1 C22.1@3294.5,1896.38 ; C22.1 3304.49,1870.5 3353.59,1821.4 H1.3 ; v2(3890,2665) 3984.99,2665 v2(3985,2655) 3985,2750.99 C1.1 ; C6.1@3974.99,3096.4 3974.99,2974.5 C5.1 C4.1 4157.39,2917.6 4217.49,2857.6 4217.49,2850 4234.99,2832.4 4234.99,2710 4214.99,2690 4214.99,2655 4262.39,2607.6 C30.1 ; v2(4075,2350) 4080,2355 v2(4080,2570) ; v2(4125,2620) 4152.56,2620 C11.1 ; C11.1 4207.19,2649.8 4220.19,2649.8 ; 4187.02,2891.33 4249.99,2954.3 ; BZ1.2 4249.99,3088.4 4249.99,2954.3 ; C3.1 4249.99,2954.3
HOLD_FLASH: U1.7 U17.67 | length 1236.6
  Top Layer w10: U17.67 3078.29,2841.7 v1(3100,2820) ; v1(3707.89,1987.53) 3720.42,1975 U1.7
  Bottom Layer w10: v1(3100,2820) 3707.89,2212.11 v1(3707.89,1987.53)
LED_1: R8.1 U17.4 | length 584.1
  Top Layer w10: R8.1@2621.59,1870 2649.99,1870 2766.19,1986.2 2766.19,2016 2979.89,2229.7 U17.4
LED_2: R9.1 U17.5 | length 670.6
  Top Layer w10: R9.1@2621.59,1780 2629.99,1780 2798.19,1948.2 2798.19,2011.9 2999.59,2213.2 U17.5
MISO_LORA: U10.13 U17.79 | length 1036.2
  Top Layer w10: U10.13@2059.39,3245.6 2109.99,3195 2109.99,3133.4 2479.79,2763.5 U17.79@2859.79,2763.5
MISO_SPI4: U2.1 U3.12 U4.5 U5.5 U17.43 | length 1170.9
  Top Layer w10: U17.43 3526.36,2684.81 3529.74,2688.19 v1(3606.61,2688.19) ; U3.12 3986.38,2693.62 v1(4030,2650) 4030.26,2650.26 4129.55,2650.26 4161.74,2682.45 4161.74,2701.85 4190.58,2673.01 v1(4243.21,2673.01) 4247.79,2673 U4.5 ; v1(4313.02,2665.39) 4347.75,2665.39 U5.5
  Bottom Layer w10: v1(3606.61,2688.19) 3701.79,2688.2 3749.99,2640 3944.99,2640 3954.99,2630 4009.99,2630 v1(4030,2650) ; v1(4243.21,2673.01) 4250.83,2665.39 v1(4313.02,2665.39)
MODE1: R17.1 SW1.1 U17.60 | length 568.9
  Top Layer w10: SW1.1 3175,3328.43 R17.1 ; v2(3200,2960) 3216.11,2943.89 U17.60
  Bottom Layer w10: SW1.1 3200,3303.43 v2(3200,2960)
MODE2: R18.1 SW1.2 U17.59 | length 566.4
  Top Layer w10: v2(3235,3000) 3235.79,2999.21 U17.59 ; SW1.2 3272.05,3232.61 R18.1
  Bottom Layer w10: v2(3235,3000) 3235,3294.33 SW1.2
MODE3: R24.1 SW1.3 U17.58 | length 598.6
  Top Layer w10: U17.58 3255.48,2970.48 v2(3285,3000) ; R24.1 3370,3329.33 SW1.3@3372.05,3331.38
  Bottom Layer w10: v2(3285,3000) 3320,3035 3320,3279.33 SW1.3
MODE4: R23.1 SW1.4 U17.57 | length 632.3
  Top Layer w10: U17.57 3275.16,2930.16 v2(3305,2960) ; SW1.4@3472.05,3331.38 3472.05,3232.61 R23.1
  Bottom Layer w10: v2(3305,2960) 3409.99,3065 3409.99,3269.3 SW1.4
MOSI_LORA: U10.14 U17.80 | length 995.7
  Top Layer w10: U10.14 2462.32,2743.86 U17.80
MOSI_SPI4: U2.2 U3.13 U4.4 U5.4 U17.44 | length 1150.8
  Top Layer w10: U17.44 3554.06,2704.49 3635.63,2786.06 3938.21,2786.06 3971.66,2752.61 ; U3.13 3944.17,2725.12 3971.66,2752.61 ; v1(4085,2825) 4044.05,2825 3971.66,2752.61 ; U2.2 v1(4202.73,2721.54) ; v1(4202.73,2721.54) U4.4 ; U4.4 v2(4275,2721.38) ; v2(4350,2705) 4365,2720 U5.4
  Bottom Layer w10: v1(4085,2825) 4099.27,2825 v1(4202.73,2721.54) ; v2(4275,2721.38) 4291.38,2705 v2(4350,2705)
NRST: H1.1 R2.1 U14.2 | length 511.9
  Top Layer w10: U14.2 3110.51,1700.35 3235,1700.35 3314.65,1700.35 3393.62,1621.38 H1.1
Q3_3: Q3.3 U35.2 | length 394.7
  Top Layer w20: Q3.3 4160.29,2205 U35.2
R3_2: R3.2 U6.9 | length 93.4
  Top Layer w10: U6.9 4046.89,3215.79 R3.2
R4_1: R4.1 U6.4 | length 92.7
  Top Layer w10: U6.4 3832.05,3214.09 R4.1@3832.05,3126.04
R5_2: R5.2 U10.4 | length 147.5
  Top Layer w10: U10.4 2669.2,3250.34 R5.2
R7_2: R7.2 U12.2 | length 121.2
  Top Layer w10: U12.2@2075,1825.2 v1(2075,1880)
  Bottom Layer w10: R7.2@2071.55,1945 2071.55,1883.45 v1(2075,1880)
R8_2: R8.2 U8.2 | length 112.1
  Top Layer w10: U8.2 R8.2@2562.29,1870
R9_2: R9.2 U15.2 | length 112.1
  Top Layer w10: U15.2 R9.2@2562.29,1780
R16_2: R16.2 U24.2 | length 122
  Top Layer w10: U24.2 v1(1800,2600)
  Bottom Layer w10: v1(1800,2600) R16.2
R19_1: R19.1 U21.3 | length 125.5
  Bottom Layer w10: R19.1@2286.59,2345 2325.49,2383.9 2325.49,2408 U21.3
R20_2: R20.2 U21.4 | length 111.4
  Bottom Layer w10: R20.2 2155.99,2454.4 U21.4@2240.39,2454.3
RF1_2: RF1.2 U6.11 | length 212.1
  Top Layer w20: U6.11@4001.99,3627 4029.99,3655 4149.99,3655 RF1.2@4187.09,3617.9
RX_CP: U17.92 U33.7 | length 601.5
  Top Layer w10: v1@2710,2610 v1(2715,2615) 2822.36,2507.64 U17.92
  Bottom Layer w10: U33.7 2443.54,2890 2715,2618.54 v1(2715,2615)
RX_MAX: U6.3 U17.46 | length 645.9
  Top Layer w10: U17.46 3514.33,2743.86 3785.44,3014.97 U6.3
SCK_LORA: U10.12 U17.78 | length 1044.7
  Top Layer w10: U10.12 2213.35,3324.37 2754.49,2783.23 U17.78
SCK_SPI4: U2.3 U3.14 U4.2 U5.2 U17.42 | length 2650.1
  Top Layer w10: U17.42 v1(3539.29,2665.13) ; U3.14 3909.85,2756.98 v1(3917.61,2756.98) ; U2.3 4183.57,2741.22 v1(4199.79,2757.44) ; U4.2 4272.19,2777.2 4294.99,2800 4385.69,2800 v1(4385.72,2794) 4407.05,2772.67 U5.2
  Bottom Layer w10: v1(3539.29,2665.13) 3629.46,2755.3 3828.59,2755.3 ; v1(3917.61,2756.98) 3899.29,2738.66 3845.23,2738.66 3828.59,2755.3 ; 3947.04,3121.51 3943.39,3125.16 3895.45,3125.16 3828.59,3058.3 3828.59,2755.3 ; v1(4199.79,2757.44) 4199.79,2770.2 4174.99,2795 4174.99,2870 4155.69,2889.3 4005.79,2889.3 3947.09,2948 3947.09,3121.5 3947.09,3127 4019.59,3199.6 4324.59,3199.6 4382.69,3141.5 4382.69,2797.1 v1(4385.72,2794)
SERVO: U17.95
SOLENOID_1: Q1.1 U17.37 U22.2 | length 627.9
  Top Layer w10: U17.37 3456.35,2564.64 3655.79,2564.64 3767.44,2452.99 U22.2 ; U22.2@3812.48,2452.4 Q1.1
SOLENOID_2: Q3.1 U17.35 U34.2 | length 699.5
  Top Layer w10: U17.35 3484.82,2527.32 3770.13,2242.01 U34.2 ; U34.2@3921.89,2242.4 Q3.1
STAT1: U17.85
STAT2: U17.86
STAT3: U17.87
STAT4: U17.88
SWCLK: H1.4 U17.76 | length 1269.1
  Top Layer w10: v1(2808.97,2820.65) 2857.86,2820.65 U17.76
  Bottom Layer w10: v1(2808.97,2820.65) 2817.2,2812.42 2817.2,2681.23 H1.4@3577.05,1921.38
SWDIO: H1.5 R13.1 U17.72 | length 1229.9
  Top Layer w10: U17.72 2979.88,2844.2 v1(2990.19,2833.89) ; H1.5@3577.05,2021.38 3577.05,2114.86 R13.1@3577.05,2141.73
  Bottom Layer w10: v1(2990.19,2833.89) 2990.19,2608.24 H1.5@3577.05,2021.38
TX_CP: U17.93 U33.6 | length 687.8
  Top Layer w10: v1(2750,2520) 2782.05,2487.95 U17.93@2859.81,2487.95
  Bottom Layer w10: U33.6 2443.78,2940 2750,2633.78 v1(2750,2520)
TX_MAX: U6.2 U17.47 | length 683.1
  Top Layer w10: v1(3380,2765) 3452.84,2765 U17.47 ; v1(3740,3115) 3742.13,3117.13 U6.2
  Bottom Layer w10: v1(3380,2765) 3730,3115 v1(3740,3115)
U7_1: R7.1 U7.1 | length 86.2
  Bottom Layer w10: R7.1 U7.1@2012.23,2031.25
U7_5: R6.1 U7.5 | length 84.6
  Bottom Layer w10: U7.5@2102.6,2035 R6.1
U9_2: Q1.3 U9.2 | length 294.4
  Top Layer w20: Q1.3@4125,2415 4154.81,2444.81 U9.2
U11_2: R4.2 U11.2 | length 103.1
  Top Layer w10: R4.2@3832.05,3066.73 3838.74,3060.04 U11.2
U17_2: U17.2 U19.1 | length 285.1
  Top Layer w10: U19.1 2866.86,2185 2940.51,2258.65 U17.2
U17_3: U17.3 U18.1 | length 379.6
  Top Layer w10: U18.1 2729.88,2018.62 2960.2,2248.94 U17.3
U17_8: C14.1 U17.8 X2.2 | length 472.2
  Top Layer w10: C14.1 X2.2@2872.89,2011.4 ; X2.2 2872.84,2057.81 3058.62,2243.59 U17.8
U17_9: C15.1 U17.9 X2.1 | length 439.6
  Top Layer w10: X2.1 2971.26,2076.78 3078.31,2183.83 U17.9 ; X2.1 C15.1
U17_12: U17.12 X1.1 | length 333
  Top Layer w10: X1.1 3060.13,2045.55 3060.13,2106.66 3140.74,2187.27 3140.74,2243.4 3137.37,2246.77 U17.12
U17_13: U17.13 X1.3 | length 216.2
  Top Layer w10: U17.13 3157.09,2112.9 X1.3@3185.39,2084.6
U17_14: C16.2 R2.2 R15.2 U17.14 | length 575.5
  Top Layer w10: U17.14 3176.69,2230.75 C16.2 3265,2142.44 R15.2 3230,1989.66 v2(3230,1880) ; R2.2@3230,1764.66 v2(3230,1795)
  Bottom Layer w10: v2(3230,1795) v2(3230,1880)
U17_20: L2.2 U17.20 | length 264
  Top Layer w10: U17.20 3294.89,2120.1 L2.2@3362.09,2052.9
U17_21: C21.2 L1.2 U17.21 | length 598.5
  Top Layer w10: U17.21 3314.49,2191.5 3440.09,2065.9 L1.2 C21.2
U17_48: C20.2 U17.48 | length 250.2
  Top Layer w10: U17.48 3511.82,2783.23 3605,2876.41 C20.2
U17_73: C19.2 U17.73 | length 302.5
  Top Layer w10: U17.73 2960.19,3070.6 C19.2
U17_94: R1.2 U17.94 | length 173
  Top Layer w10: R1.2@2716.52,2396.52 2788.27,2468.27 U17.94
U20_2: R10.2 U20.2 | length 112.1
  Top Layer w10: U20.2 R10.2@2562.29,1685
USB1_4: R11.1 USB1.4 | length 262
  Bottom Layer w10: USB1.4 2060.76,2815.79 R11.1
USB1_5: U33.2 USB1.5 USB1.7 | length 743
  Top Layer w10: v1(1755,2835) 1975,2835 v1(2025,2885)
  Bottom Layer w10: v1(1755,2835) 1755.47,2835.47 USB1.5 ; USB1.7 1833.04,2874.84 1843.2,2885 v1(2025,2885) U33.2@2202.92,2885
USB1_6: U33.1 USB1.6 USB1.8 | length 522.6
  Bottom Layer w10: USB1.6@1800.39,2855.1 1769.89,2855.1 1759.99,2865 1759.99,2885 1769.49,2894.5 USB1.8 ; USB1.6@1800.4,2855.15 2192.77,2855.15 U33.1
USB1_10: R12.2 USB1.10 | length 168.8
  Bottom Layer w10: USB1.10 R12.2@1969.24,2933.9
V_BAT: C13.2 Q2.3 R21.1 U7.3 U13.1 | length 980.7
  Top Layer w20: U13.1 1923.42,2048.42 v1(2090,2215)
  Bottom Layer w20: U13.1 1785.87,2107.4 U7.3 ; Q2.3 2090,2216.38 v1(2090,2215) 2090.92,2215.92 C13.2 ; R21.1 C13.2@2190.34,2199.09
V_CK: R21.2 R22.1 U17.15 | length 1082.8
  Top Layer w10: v1(2545,2250) 2816.61,2250 2916.83,2350.22 3169.73,2350.22 3196.42,2323.53 U17.15
  Bottom Layer w10: R21.2 2273.41,2120 2273.75,2119.66 R22.1 ; R22.1 2409.69,2119.7 v1@2539.99,2250
V_IN: C29.1 Q2.2 R14.1 R20.1 U21.6 | length 525.3
  Bottom Layer w20: Q2.2 2049.65,2318.26 2049.65,2455 2089.31,2494.66 R20.1 ; R20.1 2149.69,2494.7 2251.89,2596.9 C29.1 ; 2197.16,2542.16 2233.73,2505.59 U21.6@2239.9,2505.59
V_USB: C12.1 C27.2 D1.1 Q2.1 R14.2 R16.1 U7.4 U33.5 USB1.2 USB1.11 | length 2569.6
  Bottom Layer w20: USB1.2 1838.88,2770.51 1901.55,2707.84 R16.1@1901.55,2600 ; USB1.11 1845.44,2959.49 2083.86,3197.91 ; D1.1 1825.94,2511.2 R16.1@1901.55,2586.81 ; R16.1@1906.55,2605 C12.1 ; C12.1@1994.19,2585.8 2034.99,2545 2150.49,2545 2184.99,2579.5 2184.99,2662.2 2369.79,2847 2369.79,2969.8 2389.99,2990 U33.5 ; 2020.99,2554 1990.34,2523.35 R14.2 1979.49,2444.15 Q2.1 1979.49,2192.4 2021.89,2150 2060,2150 U7.4@2100.2,2109.8 ; 2090,3180 2202.56,3180 C27.2 2293.3,3122.56 U33.5
WP_FLASH: U1.3 U17.68 | length 1676.8
  Top Layer w10: v1(3055,2820) 3058.62,2823.62 U17.68 ; v1(3922.56,2023.45) 4059.8,2023.45 U1.3@4061.35,2025
  Bottom Layer w10: v1(3055,2820) 3054.99,2675.4 3623.99,2106.5 3623.99,1936.7 3640.69,1920 3827.49,1920 3922.59,2015 v1(3922.56,2023.45)
pads on no net: U2.4 U2.9 U2.10 U2.11 U2.13 U2.14 U3.3 U3.8 U3.9 U3.10 U3.11 U4.7 U5.7 U6.5 U6.13 U6.14 U6.16 U6.17 U6.18 U10.1 U10.7 U10.8 U10.11 U17.1 U17.7 U17.16 U17.17 U17.18 U17.22 U17.23 U17.24 U17.25 U17.32 U17.33 U17.34 U17.36 U17.51 U17.52 U17.53 U17.54 U17.55 U17.56 U17.61 U17.62 U17.63 U17.64 U17.65 U17.66 U17.69 U17.70 U17.71 U17.77 U17.83 U17.89 U17.90 U17.91 U17.96 U17.97 U17.98 U21.2 U33.4 USB1. USB1.3 USB1.9 USB1.13 USB1.14

## Other copper
Bottom Layer:
  region net +3V3: 2016.81,3355.39 2095.55,3355.39 2095.55,3434.13 2016.81,3434.13
  region net V_USB: 2016.81,3158.54 2095.55,3158.54 2095.55,3237.28 2016.81,3237.28
  region net GND: 1819.96,3158.54 1898.7,3158.54 1898.7,3237.28 1819.96,3237.28

## Silkscreen, mask and mechanical layers (free items; w line width, h text height)
Top Overlay:
  text "GPS" at 3967.05,2876.38 h80
  text "PARACHUTE_1" at 3996.89,2565 h80
  text "UBS" at 1601.89,2470 h80
  text "V_BAT" at 1601.73,2198.62 h80
  text "K1" at 2281.73,2158.62 h80
  text "SWDIO" at 3630,2035 h45
  text "K2" at 2281.57,1992.24 h80 r1
  text "SWCLK" at 3630,1935 h45
  text "GND" at 3630,1835 h45 r1
  text "+3V3" at 3635,1665 h45
  text "GND" at 1586.73,1663.62 h80 r1
  text "RST" at 3640,1600 h45
  text "POWER" at 2266.89,1570 h80
  text "RESET" at 2841.89,1545 h80
  text "PARACHUTE_2" at 3981.89,1535 h80
Bottom Overlay:
  text "+3V3" at 2295,3360 h80
  text "GND" at 1800,3170 h80 r359
  text "V_USB" at 2365,3170 h80
Bottom Solder:
  region net GND: 1819.96,3158.54 1898.7,3158.54 1898.7,3237.28 1819.96,3237.28
  region net V_USB: 2016.81,3158.54 2095.55,3158.54 2095.55,3237.28 2016.81,3237.28
  region net +3V3: 2016.81,3355.39 2095.55,3355.39 2095.55,3434.13 2016.81,3434.13

## Text inside footprints (layer, text, board x,y; h text height)
BZ1: Top Overlay "+" at 4271.89,2968.55 h78.74 r313
SW1: Top Overlay "1" at 3168.25,3392.02 h19.68 r180; Top Overlay "2" at 3267.75,3392.42 h19.68 r180; Top Overlay "3" at 3364.55,3392.42 h19.68 r180; Top Overlay "ON" at 3145.25,3552.23 h31.5; Top Overlay "4" at 3467.34,3389.74 h19.68 r144